# Altium PCB JLINK-OB.PcbDoc
Units mil, origin at the board's own origin, x right, y up, seen from the top; angles counter-clockwise.
Board outline 1775 x 790.16 mil, 2 copper layers (Top Layer, Bottom Layer); 33 components, 27 nets, 123 pads, 36 vias.
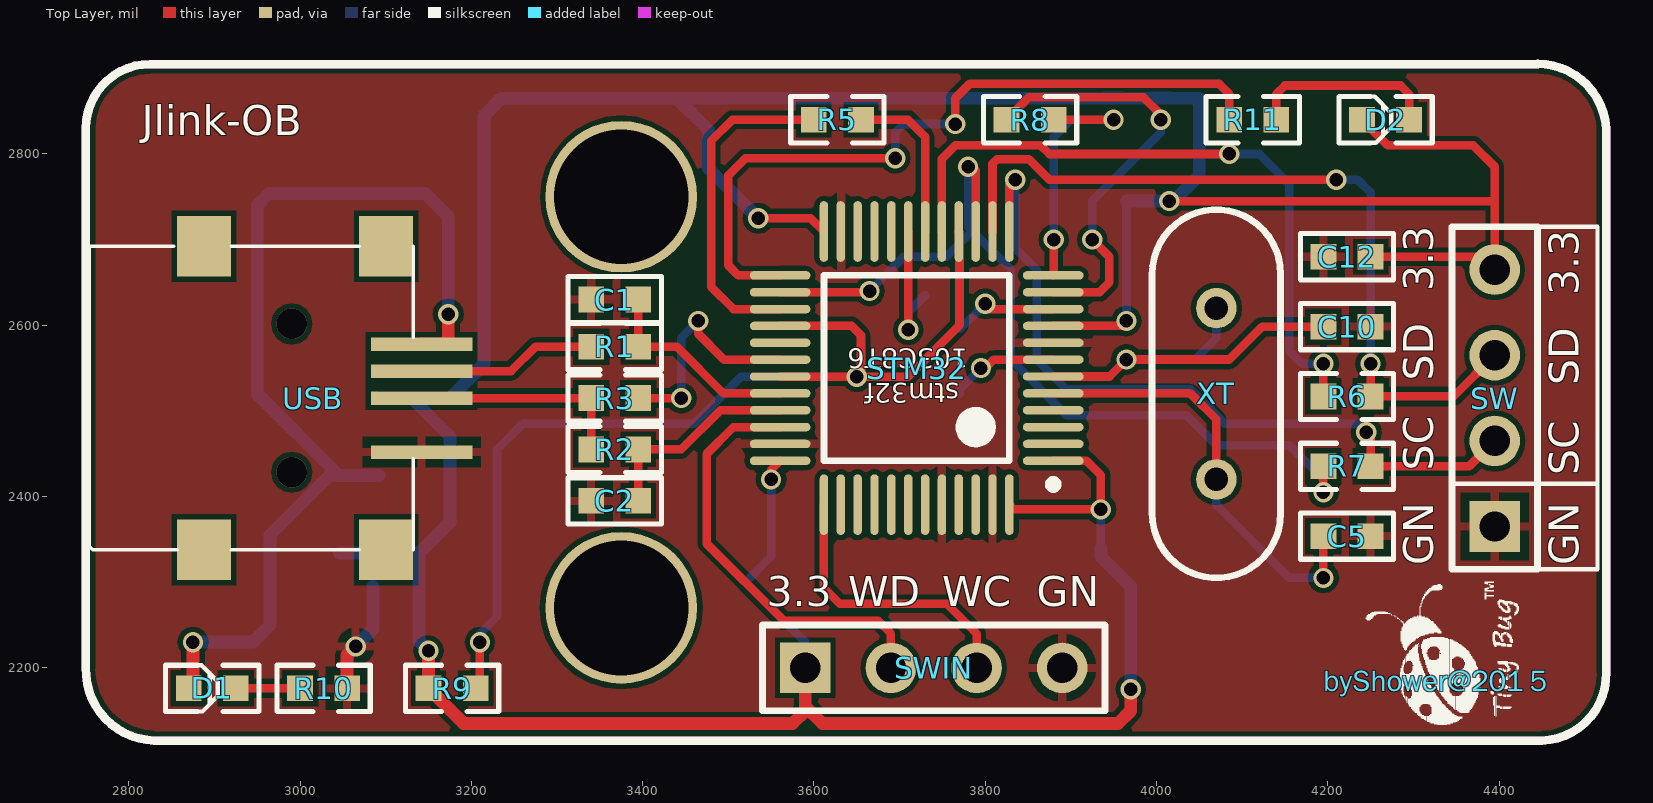
[diagram p0: Top Layer view]
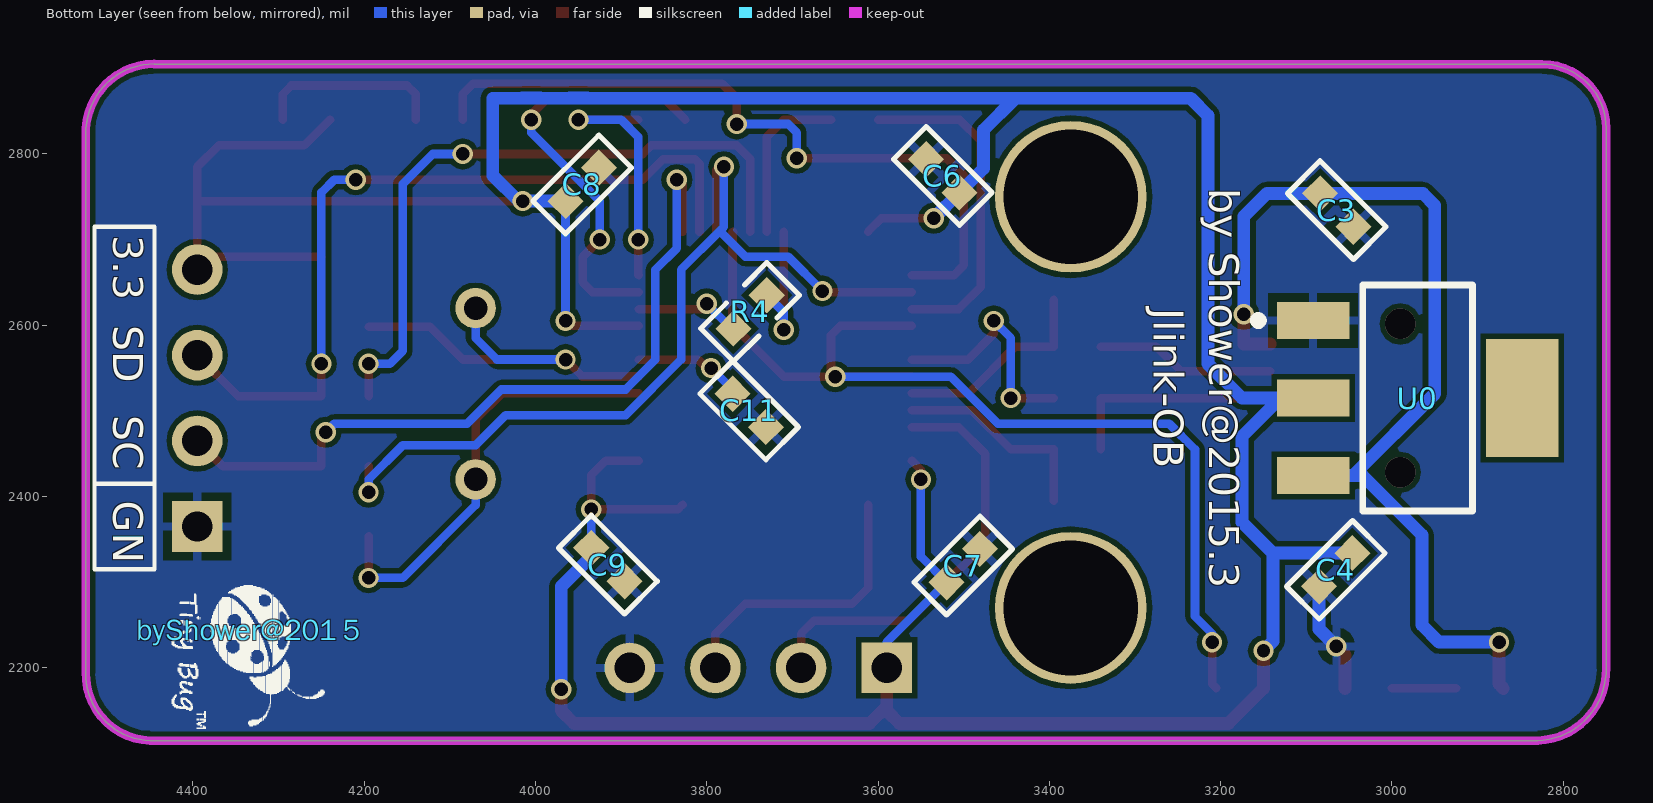
[diagram p1: Bottom Layer view, seen from below]
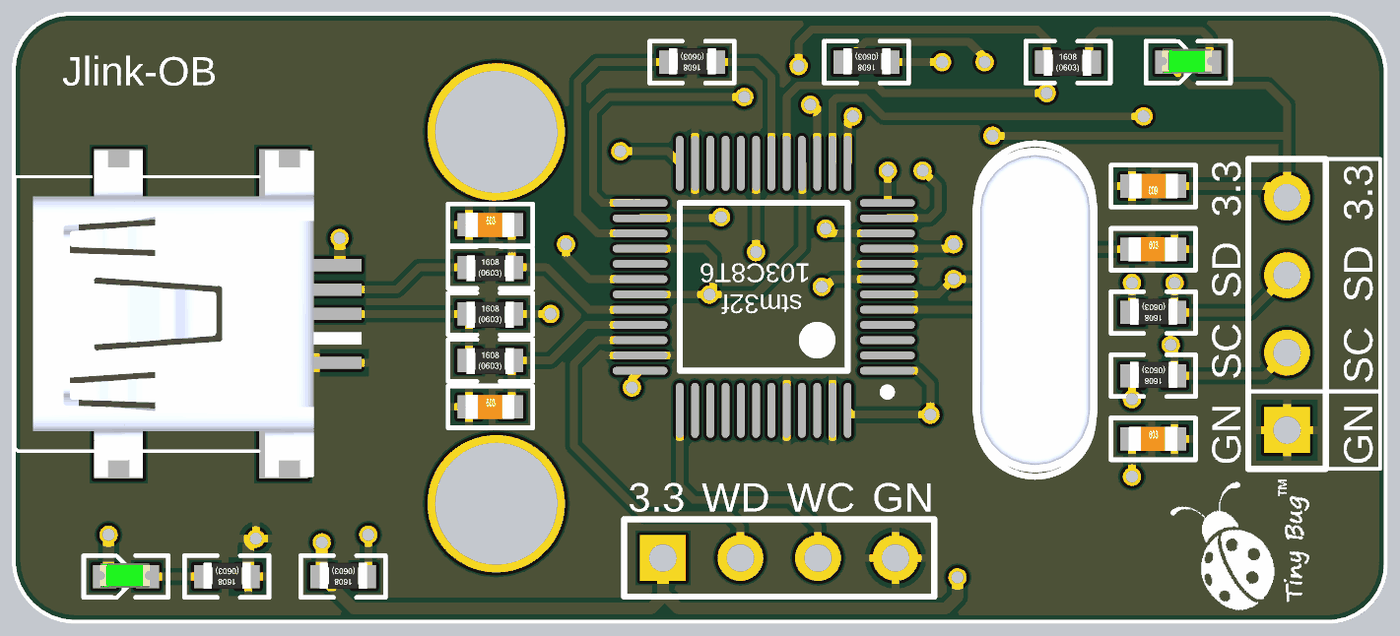
[diagram p2: 3D render of the assembled board from above, using the file's embedded part models]
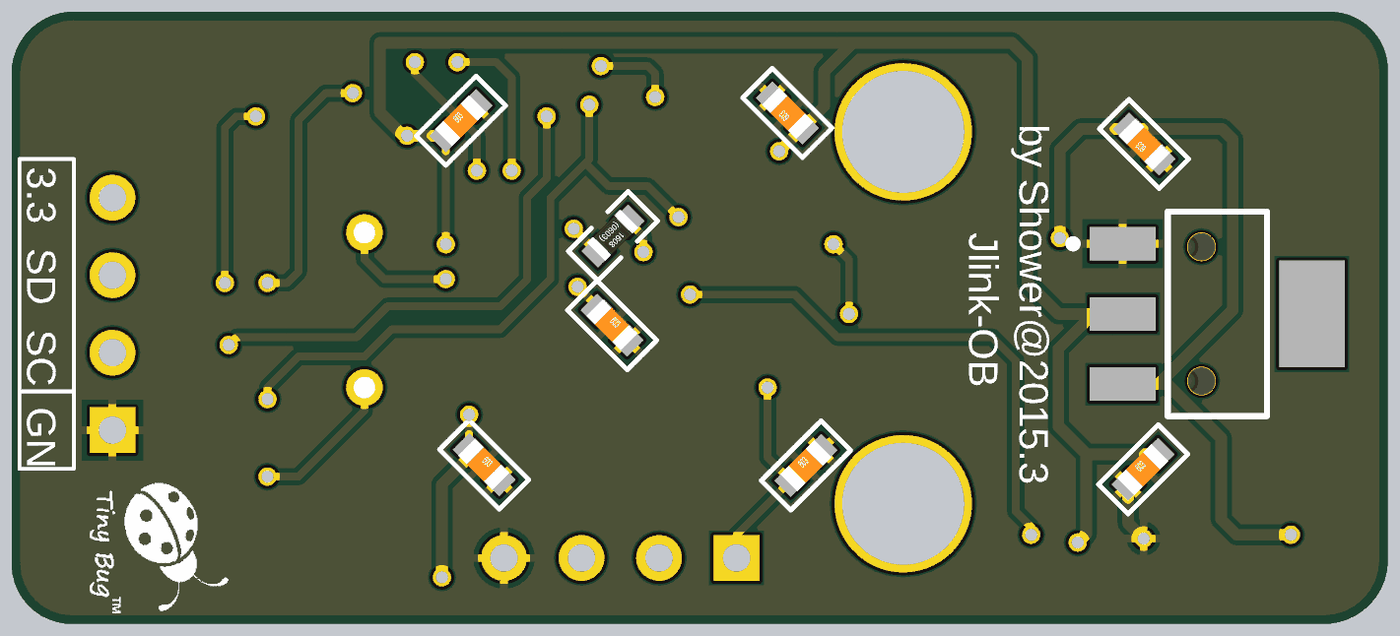
[diagram p3: 3D render of the assembled board from below, using the file's embedded part models]

## Layer stack, top to bottom
Top Solder: solder mask 0.4, Solder Resist, Dk 3.5
Top Layer: signal copper 1.4
Dielectric1: dielectric 12.6, FR-4, Dk 4.8
Bottom Layer: signal copper 1.4
Bottom Solder: solder mask 0.4, Solder Resist, Dk 3.5

## Board outline
2750,2200 2750,2830 cw(c2825,2830) 2825,2905 4445,2905 4445,2905.16 cw(c4445,2825) 4525,2830 4525,2195 cw(c4447.5,2192.5) 4450,2115 2830,2115 cw(c2832.5,2197.5)

## Design rules (kind name [scope] priority, off if disabled: settings)
Clearance [All] p1: gap=6 ignorepadtopadclearanceinfootprint=FALSE except(0: Arc-Hole Track-Hole SMDPad-Hole THPad-Hole Via-Hole Fill-Hole Poly-Hole Region-Hole Text-Hole)
PolygonConnect [All] p1: connectstyle=Relief reliefconductorwidth=10 reliefentries=4 polygonreliefangle="90 Angle" airgapwidth=10
RoutingCorners [All] p1: cornerstyle=Round minsetback=100 maxsetback=100
RoutingVias [All] p1: holewidth=15.75 width=23.62 viastyle="Through Hole" minholewidth=15.75 minwidth=23.62 maxholewidth=15.75 maxwidth=23.62
SolderMaskExpansion [All] p1: expansion=4
Width [All] p1: maxlimit=15 minlimit=10 preferedwidth=10
29 further rules are at their usual default settings.

## Classes and differential pairs
component class JLink_ARM-OB_Sch: C1 C2 C3 C4 C5 C6 C7 C8 C9 C10 C11 C12 D1 D2 R1 R2 R3 R4 R5 R6 R7 R8 R9 R10 R11 STM32 SW SWIN U0 USB XT

## Components (designator, comment, footprint, x,y, rotation, side; value= is the part's Value field where it differs from the comment)
byShower@201５ "Comment" TinyBug_Logo 4331,2244.67 r270 bottom
byShower@201５ "Comment" TinyBug_Logo 4330,2185 r90 top
C1 "Cap_0603" 0603C 3340,2630 r0 top
C2 "Cap_0603" 0603C 3340,2395 r0 top
C3 "Cap_0603" 0603C 3045,2715 r45 bottom
C4 "Cap_0603" 0603C 3085,2295 r135 bottom
C5 "Cap_0603" 0603C 4195,2353.75 r0 top
C6 "Cap_0603" 0603C 3505,2755 r45 bottom
C7 "Cap_0603" 0603C 3520,2300 r135 bottom
C8 "Cap_0603" 0603C 3965,2745 r135 bottom
C9 "Cap_0603" 0603C 3935,2340 r225 bottom
C10 "Cap_0603" 0603C 4195,2598.44 r0 top
C11 "Cap_0603" 0603C 3770,2520 r225 bottom
C12 "Cap_0603" 0603C 4250,2680 r180 top
D1 "LED_0603" LED-0603 2870,2176.06 r0 top
D2 "LED_0603" LED-0603 4240,2840 r0 top
R1 "Res_0603" 0603R 3340,2575 r0 top
R2 "Res_0603" 0603R 3340,2455 r0 top
R3 "Res_0603" 0603R 3340,2515 r0 top
R4 "Res_0603" 0603R 3730,2635 r315 bottom
R5 "Res_0603" 0603R 3655,2840 r180 top
R6 "Res_0603" 0603R 4250,2516.88 r180 top
R7 "Res_0603" 0603R 4250,2435.31 r180 top
R8 "Res_0603" 0603R 3880,2840 r180 top
R9 "Res_0603" 0603R 3205,2176.06 r180 top
R10 "Res_0603" 0603R 3055,2176.06 r180 top
R11 "Res_0603" 0603R 4085,2840 r0 top
STM32 "STM32F103C" LQFP48_N 3720,2550 r180 top
SW "HDR1X4_90_2.54" HDR1X4 4395,2515 r90 top
SWIN "Pad1X4_1.27_SWD" HDR1X4 3740,2200 r0 top
U0 "AMS1117_3.3" AMS1117_3.3V 2970,2515 r270 bottom
USB "USB_MINI" USB_MINI 3010,2515 r0 top
XT "XTAL_5032_2P" XTAL 4070,2520 r270 top

## Footprints (in the part's own frame and the unit in brackets; to place one, negate y for a bottom-side part, rotate by r counter-clockwise, add the part's x,y. Pads: shape width x height; smd on the part's side, far side on the other; paste and mask are expansions set on the pad)
0603C [mil]
  rect 30x30 smd: 1(0,0) 2(55,0)
  silkscreen extent -27,-27 82,27, body extent -4,-16 59,16, height 12
0603R [mil]
  rect 30x30 smd: 1(0,0) 2(55,0)
  silkscreen extent -27,-27 82,27, body extent -4,-18 58,16, height 18
AMS1117_3.3V [mm]
  rect 1.1x2.15 smd: 1(-2.3,-3.1) 2(0,-3.1) 3(2.3,-3.1)
  rect 3.5x2.15 smd: 4(0,3.1)
  silkscreen extent -3.35,-4.85 3.35,1.62, body extent -3.3,-3.11 3.3,3.87, height 1
HDR1X4 [mm] "Connector; Header; 4 Position"
  rect 1.5x1.5 hole 0.9: 1(-3.81,0)
  round 1.5 hole 0.9: 2(-1.27,0) 3(1.27,0) 4(3.81,0)
  silkscreen extent -5.08,-1.27 5.08,1.27, body extent -5.08,-1.27 5.08,1.27, height 8.6
LED-0603 [mil]
  rect 30x30 smd: 1(0,0) 2(55,0)
  silkscreen extent -27,-27 82,27, body extent -6,-14 58,17, height 24
LQFP48_N [mm] "Thin QFP, 48-Leads, Body 7x7mm, Pitch 0.5mm, IPC Medium Density"
  oval 1.8x0.25 smd: 1(-4.05,2.75) 2(-4.05,2.25) 3(-4.05,1.75) 4(-4.05,1.25) 5(-4.05,0.75) 6(-4.05,0.25) 7(-4.05,-0.25) 8(-4.05,-0.75) 9(-4.05,-1.25) 10(-4.05,-1.75) 11(-4.05,-2.25) 12(-4.05,-2.75) 25(4.05,-2.75) 26(4.05,-2.25) 27(4.05,-1.75) 28(4.05,-1.25) 29(4.05,-0.75) 30(4.05,-0.25) 31(4.05,0.25) 32(4.05,0.75) 33(4.05,1.25) 34(4.05,1.75) 35(4.05,2.25) 36(4.05,2.75)
  oval 0.25x1.8 smd: 13(-2.75,-4.05) 14(-2.25,-4.05) 15(-1.75,-4.05) 16(-1.25,-4.05) 17(-0.75,-4.05) 18(-0.25,-4.05) 19(0.25,-4.05) 20(0.75,-4.05) 21(1.25,-4.05) 22(1.75,-4.05) 23(2.25,-4.05) 24(2.75,-4.05) 37(2.75,4.05) 38(2.25,4.05) 39(1.75,4.05) 40(1.25,4.05) 41(0.75,4.05) 42(0.25,4.05) 43(-0.25,4.05) 44(-0.75,4.05) 45(-1.25,4.05) 46(-1.75,4.05) 47(-2.25,4.05) 48(-2.75,4.05)
  silkscreen extent -4.18,-2.75 2.75,3.57, body extent -3.5,-3.5 3.5,3.5, height 1.6
TinyBug_Logo [mil]
  silkscreen extent -52,-93 116,85
USB_MINI [mm]
  rect 3x0.4 smd: 1(3.354,1.6) 2(3.354,0.8) 3(3.354,0) 5(3.354,-1.6)
  rect 3x0.4 on Top Overlay: 4(3.354,-0.8)
  rect 1.6x1.8 smd: 6(2.3,-4.5) 7(2.3,4.5) 8(-3.1,4.5) 9(-3.1,-4.5)
  silkscreen extent -6.5,-4.5 3.1,4.5, body extent -5.9,-5.35 3.3,5.35, height 4.95
XTAL [mm] "Radial Cap, Thru-Hole; 2 Leads; 0.2 in Pin Spacing"
  round 1.2 hole 0.7: 1(-2.54,0) 2(2.54,0)
  silkscreen extent -5.46,-1.91 5.46,1.91, body extent -5.33,-2.05 5.33,2.05, height 3.22

## Part data
C1 C2 C3 C4 C5 C6 C7 C8 C9 C10 C11 C12: "Capacitor"
D1 D2: "LED"
R1 R2 R3 R4 R5 R6 R7 R8 R9 R10 R11: "Resistor"
STM32: "MCU"
SW SWIN: "Header"
U0: library part AMS1117-3.3
XT: "Crystal Oscillator"

## Free pads (board coordinates)
  round 177.17 hole 157.48: 0(3375,2750) 1(3375,2270)

## Via types
v1: diameter 23.62, hole 15.75, Top Layer to Bottom Layer, 34 vias
v2: diameter 35.43, hole 35.43, Top Layer to Bottom Layer, 2 vias

## Nets (pads, with @x,y where several pads share a name; then routed paths per layer and width w, separated by ;. In a path a pad name is that pad's centre, name@x,y a point inside that pad or via, vN(x,y) a via of type N, cw(c..) or ccw(c..) an arc to the next point about the centre after c; other vN are vias at no path point)
3V3: C4.2 C6.1 C7.1 C8.1 C9.1 C12.1 D2.1 R9.2 STM32.1 STM32.9 STM32.24 STM32.36 STM32.48 SW.4 SWIN.1 U0.2 | length 4906.4
  Top Layer w10: v1(3535,2725) 3596.18,2725 STM32.24 ; v1(3550,2420) 3550,2431.18 STM32.36 ; STM32.48 3833.82,2385 v1(3935,2385) 3935,2425 3918.27,2441.73 STM32.1 ; STM32.9 3959.21,2599.21 v1(3965,2605) ; v1(4015,2745) 4395,2745 ; D2.1 4270,2810 4370,2810 4395,2785 4395,2745 ; C12.1 4380,2680 SW.4 4395,2745
  Top Layer w15: v1(3150,2220) R9.2 3191.06,2135 3575,2135 3590,2150 3590,2155 ; SWIN.1 3590,2155 ; v1(3970,2175) 3970,2150 3955,2135 3610,2135 3590,2155
  Bottom Layer w10: v1(3550,2420) 3550,2330 C7.1 3590,2230 SWIN.1 ; C9.1 v1(3935,2385) ; v1(3965,2605) C8.1
  Bottom Layer w15: C4.2 3138.89,2333.89 ; U0.2 U0.2@3130,2515 ; v1(3150,2220) 3138.89,2231.11 3138.89,2333.89 ; v1(3535,2725) C6.1 3477.08,2782.92 3477.08,2827.92 3440,2865 ; C9.1 3935,2330 3970,2295 v1(3970,2175) ; C8.1 v1(4015,2745) 4020,2745 4050,2775 4050,2865 4015.8,2865 4015.48,2865.31 3994.52,2865.31 3994.2,2865 3960.8,2865 3960.48,2865.31 3939.52,2865.31 3939.2,2865 3440,2865 ; U0.2@3130,2515 3175,2470 3175,2370 3138.89,2333.89 ; U0.2@3130,2515 3175,2515 3215,2555 3215,2845 3235,2865 3440,2865
D+: C2.2 R2.2 STM32.33 | length 244.5
  Top Layer w10: C2.2 R2.2 3445,2455 3490.79,2500.79 STM32.33
D-: C1.2 R1.2 STM32.32 | length 243.1
  Top Layer w10: C1.2 R1.2 3440,2575 3494.53,2520.47 STM32.32
GND: C1.1 C2.1 C3.1 C4.1 C5.2 C6.2 C7.2 C8.2 C9.2 C10.2 C11.2 C12.2 R10.1 STM32.8 STM32.23 STM32.35 STM32.44 STM32.47 SW.1 SWIN.4 U0.1 USB.5 | length 131.4
  Top Layer w15: R10.1 3055,2215 v1(3065,2225)
  Bottom Layer w15: v1(3065,2225) 3085,2245 C4.1
JTCK: STM32.37 SWIN.3 | length 337.6
  Top Layer w10: STM32.37 3611.73,2293.27 3630,2275 3755,2275 3790,2240 SWIN.3
JTMS: STM32.34 SWIN.2 | length 501.9
  Top Layer w10: STM32.34 3506.1,2481.1 3475,2450 3475,2345 3565,2255 3675,2255 3690,2240 SWIN.2
LED: R11.1 STM32.25 | length 869.9
  Top Layer w10: STM32.25 3511.73,2658.27 3500,2670 3500,2775 3520,2795 v1(3695,2795) ; v1(3765,2835) 3765,2865 3782,2882 4073,2882 4085,2870 R11.1
  Bottom Layer w10: v1(3695,2795) 3695,2825 3705,2835 v1(3765,2835)
NetD1_2: D1.2 R10.2 | length 75
  Top Layer w10: D1.2 R10.2
NetD2_2: D2.2 R11.2 | length 223.3
  Top Layer w10: R11.2 4140,2870 4150,2880 4285,2880 4295,2870 D2.2
NetR1_1: R1.1 USB.2 | length 209.8
  Top Layer w10: USB.2 3246.5,2546.5 3275,2575 R1.1
NetR2_1: R2.1 R3.1 USB.3 | length 258
  Top Layer w10: USB.3 R3.1 R2.1
RD+: R3.2 STM32.30 | length 271.3
  Top Layer w10: R3.2 v1(3445,2515) ; v1(3465,2605) 3465,2590 3495.16,2559.84 STM32.30
  Bottom Layer w10: v1(3445,2515) 3445,2585 v1(3465,2605)
RST: C11.1 STM32.7 | length 128.9
  Top Layer w10: v1(3795,2550) 3800,2550 3809.84,2559.84 STM32.7
  Bottom Layer w10: C11.1 3770,2525 v1(3795,2550)
TCK_I: R7.1 STM32.13 SW.2 | length 903
  Top Layer w10: STM32.13 3828.27,2763.27 v1(3835,2770) ; v1(4245,2475) 4250,2470 R7.1 4365.31,2435.31 SW.2
  Bottom Layer w10: v1(3835,2770) 3835,2690 3860,2665 3860,2560 3895,2525 4040,2525 4080,2485 4235,2485 v1(4245,2475)
TCK_O: R7.2 STM32.15 STM32.26 | length 1050.2
  Top Layer w10: STM32.26 3663.58,2638.58 v1(3665,2640) ; v1(3780,2785) 3785,2785 3788.9,2781.1 STM32.15 ; v1(4195,2405) R7.2
  Bottom Layer w10: v1(3665,2640) 3705,2680 3755,2680 3785,2710 ; v1(3780,2785) 3780,2715 3785,2710 ; v1(4195,2405) 4195,2420 4155,2460 4070,2460 4035,2495 3895,2495 3830,2560 3830,2665 3785,2710
TDI_I: R5.1 STM32.18 | length 193.8
  Top Layer w10: R5.1 3710,2840 3729.84,2820.16 STM32.18
TDI_O: R5.2 STM32.27 | length 391.7
  Top Layer w10: STM32.27 3506.1,2618.9 3480,2645 3480,2815 3505,2840 R5.2
TDO_I: R9.1 STM32.16 STM32.28 STM32.31 | length 1237.8
  Top Layer w10: R9.1 3210,2181.06 v1(3210,2230) ; STM32.28 3644.21,2599.21 3655,2588.42 3655,2545 v1(3650,2540) ; STM32.31@3560.71,2540 v1(3650,2540) ; STM32.16 3770,2708.66 3770,2600 3710,2540 v1(3650,2540)
  Bottom Layer w10: v1(3210,2230) 3210,2240 3230,2260 3230,2455 3260,2485 3460,2485 3515,2540 v1(3650,2540)
TMS_I: R6.1 STM32.14 SW.3 | length 942
  Top Layer w10: STM32.14 3808.58,2788.58 3814,2794 3851,2794 3875,2770 v1(4210,2770) ; v1(4250,2555) R6.1 4346.88,2516.88 SW.3
  Bottom Layer w10: v1(4210,2770) 4235,2770 4250,2755 v1(4250,2555)
TMS_O: R6.2 STM32.17 | length 794.9
  Top Layer w10: STM32.17 3749.53,2794.53 3765,2810 3865,2810 3875,2800 v1(4085,2800) ; R6.2 v1(4195,2555)
  Bottom Layer w10: v1(4085,2800) 4120,2800 4155,2765 4155,2570 4170,2555 v1(4195,2555)
TRES_I: R8.1 STM32.12 | length 310.2
  Top Layer w10: STM32.12 3880,2658.82 v1(3880,2700) ; R8.1 v1(3950,2840)
  Bottom Layer w10: v1(3880,2700) 3880,2820 3900,2840 v1(3950,2840)
TRES_O: R8.2 STM32.11 | length 506.8
  Top Layer w10: R8.2 3851,2866 3985,2866 4005,2846 v1(4005,2840) ; STM32.11 3933.58,2638.58 3945,2650 3945,2680 v1(3925,2700)
  Bottom Layer w10: v1(3925,2700) 3925,2745 4005,2825 v1(4005,2840)
TRST_I: R4.1 STM32.19 | length 163
  Top Layer w10: v1(3710.16,2594.84) STM32.19
  Bottom Layer w10: v1(3710.16,2594.84) 3710.16,2615.16 R4.1
TRST_O: R4.2 STM32.10 | length 125.1
  Top Layer w10: v1(3800,2625) 3806.1,2618.9 STM32.10
  Bottom Layer w10: R4.2 3771.11,2596.11 v1(3800,2625)
VCC: C3.2 D1.1 U0.3 USB.1 | length 1190.1
  Top Layer w15: D1.1 2875,2181.06 v1(2875,2230) ; USB.1 3172.99,2577.99 v1(3172.99,2612.99)
  Bottom Layer w15: v1(2875,2230) 2945,2230 2965,2250 2965,2355 3034.45,2424.45 3045.55,2424.45 ; U0.3 3045.55,2424.45 ; v1(3172.99,2612.99) 3172.99,2727.01 3146.11,2753.89 C3.2 2963.89,2753.89 2950,2740 2950,2520 3045.55,2424.45
X1: C5.1 STM32.5 XT.2 | length 511.9
  Top Layer w10: STM32.5 4039.53,2520.47 ; 4039.53,2520 4040,2520 4070,2490 XT.2 ; v1(4195,2305) C5.1
  Bottom Layer w10: XT.2 4070,2390 4155,2305 v1(4195,2305)
X2: C10.1 STM32.6 XT.1 | length 490
  Top Layer w10: STM32.6 3945.16,2540.16 v1(3965,2560) 4085,2560 4123.44,2598.44 C10.1
  Bottom Layer w10: v1(3965,2560) 4045,2560 4070,2585 XT.1
pads on no net: STM32.2 STM32.3 STM32.4 STM32.20 STM32.21 STM32.22 STM32.29 STM32.38 STM32.39 STM32.40 STM32.41 STM32.42 STM32.43 STM32.45 STM32.46 U0.4 USB.4 USB.6 USB.7 USB.8 USB.9
copper on no net:
  other v2: 2990.32,2428.39 2990.32,2601.61

## Polygon pours and split planes (outlines as drawn)
GND on Top Layer "Top Layer-No Net" (solid, remove dead copper, pour order 4): 2725,2925 4550,2925 4550,2105 4555,2100 2725,2100 2725,2925
GND on Bottom Layer "Top Layer-No Net" (solid, remove dead copper, pour order 6): 2725,2925 4550,2925 4550,2100 2725,2100

## Keep-outs
Keep-Out Layer:
  lines w10: 4445,2905 2825,2905 ccw(c2825,2830) 2750,2830 2750,2200 ccw(c2832.5,2197.5) 2830,2115 4450,2115 ccw(c4447.5,2192.5) 4525,2195 4525,2830 ccw(c4445,2825) 4445,2905.16

## Silkscreen, mask and mechanical layers (free items; w line width, h text height)
Top Overlay:
  lines w5: 4345,2315 4345,2715 ; 4345,2415 4510,2415 ; 4445,2315 4515,2315 4515,2715 ; 4510,2415 4515,2415 4510,2415 ; 4515,2715 4445,2715 4515,2715
  lines w10: 4445,2905 2825,2905 ccw(c2825,2830) 2750,2830 2750,2200 ccw(c2832.5,2197.5) 2830,2115 4450,2115 ccw(c4447.5,2192.5) 4525,2195 4525,2830 ccw(c4445,2825) 4445,2905.16
  text "Jlink-OB" at 2815,2810 h60
  text "3.3" at 4335,2640 h60 r90
  text "3.3" at 4505,2635 h60 r90
  text "103C8T6" at 3780,2580 h39.37 r180
  text "stm32f" at 3770,2540 h39.37 r180
  text "SD" at 4335,2535 h60 r90
  text "SD" at 4505,2530 h60 r90
  text "SC" at 4335,2430 h60 r90
  text "SC" at 4505,2425 h60 r90
  text "GN" at 4335,2320 h60 r90
  text "GN" at 4505,2320 h60 r90
  text "3.3" at 3545,2260 h60
  text "WD" at 3640,2260 h60
  text "WC" at 3750,2260 h60
  text "GN" at 3860,2260 h60
Bottom Overlay:
  lines w5: 4445,2415 4515,2415 ; 4445,2315 4515,2315 4515,2715 4445,2715 4445,2315
  text "by Shower@2015.3" at 3225,2760 h60 r90
  text "3.3" at 4505,2705 h60 r90
  text "Jlink-OB" at 3290,2620 h60 r90
  text "SD" at 4505,2600 h60 r90
  text "SC" at 4505,2495 h60 r90
  text "GN" at 4505,2395 h60 r90